# EAGLE board EBook_Reader_v26-Board (EAGLE 9.7.0)
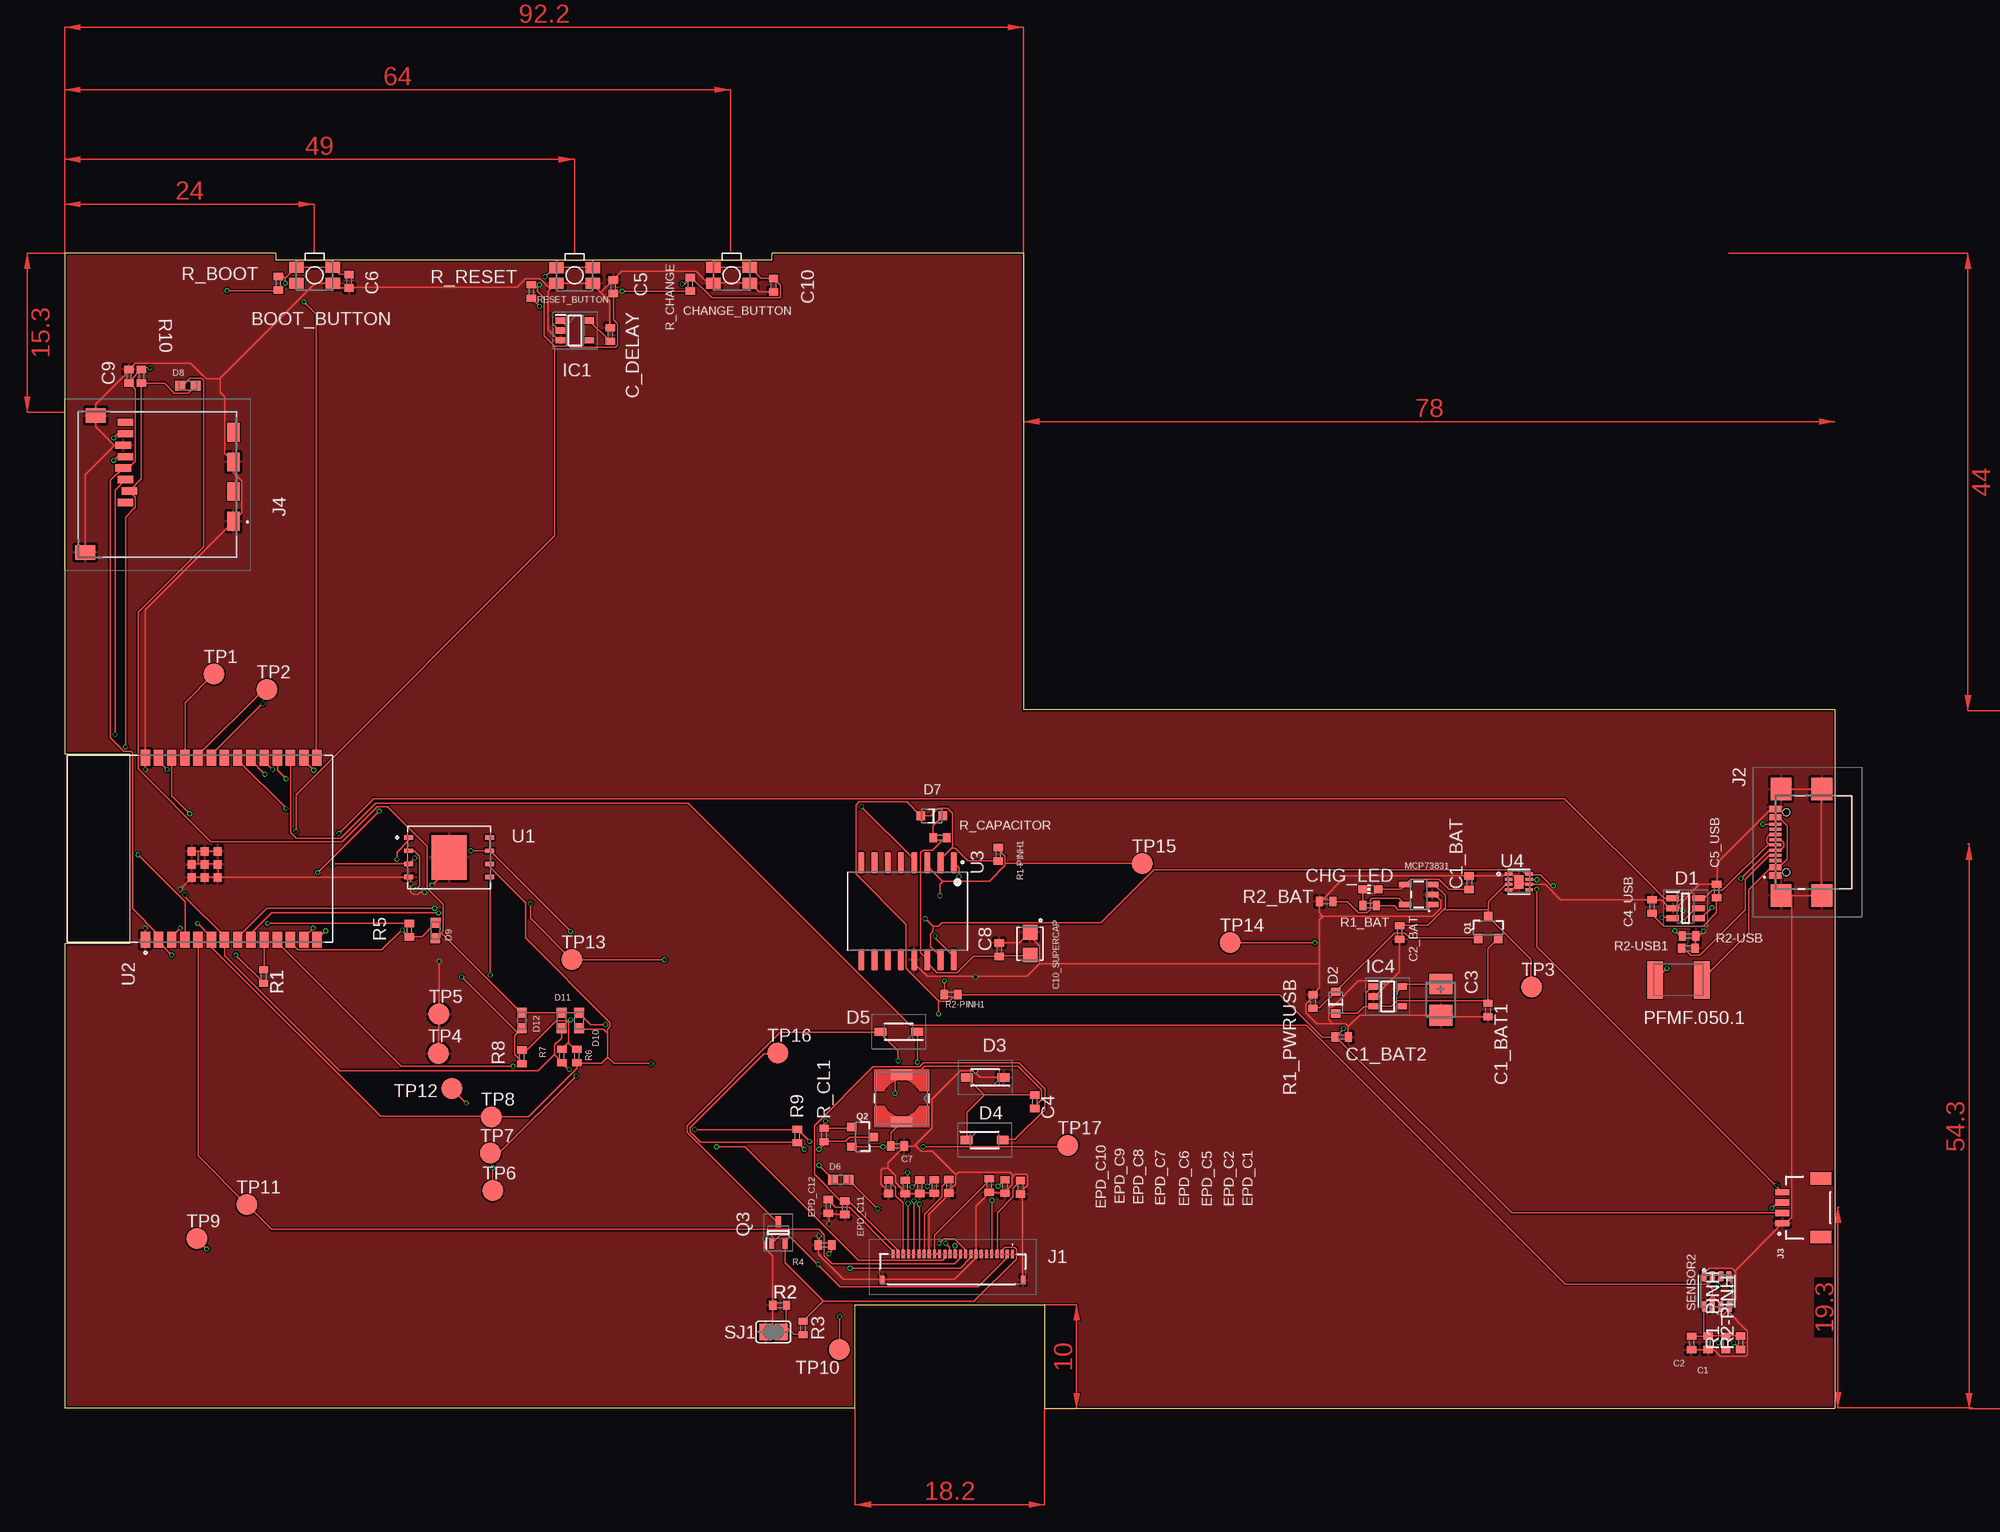
[diagram p0: board, top side]
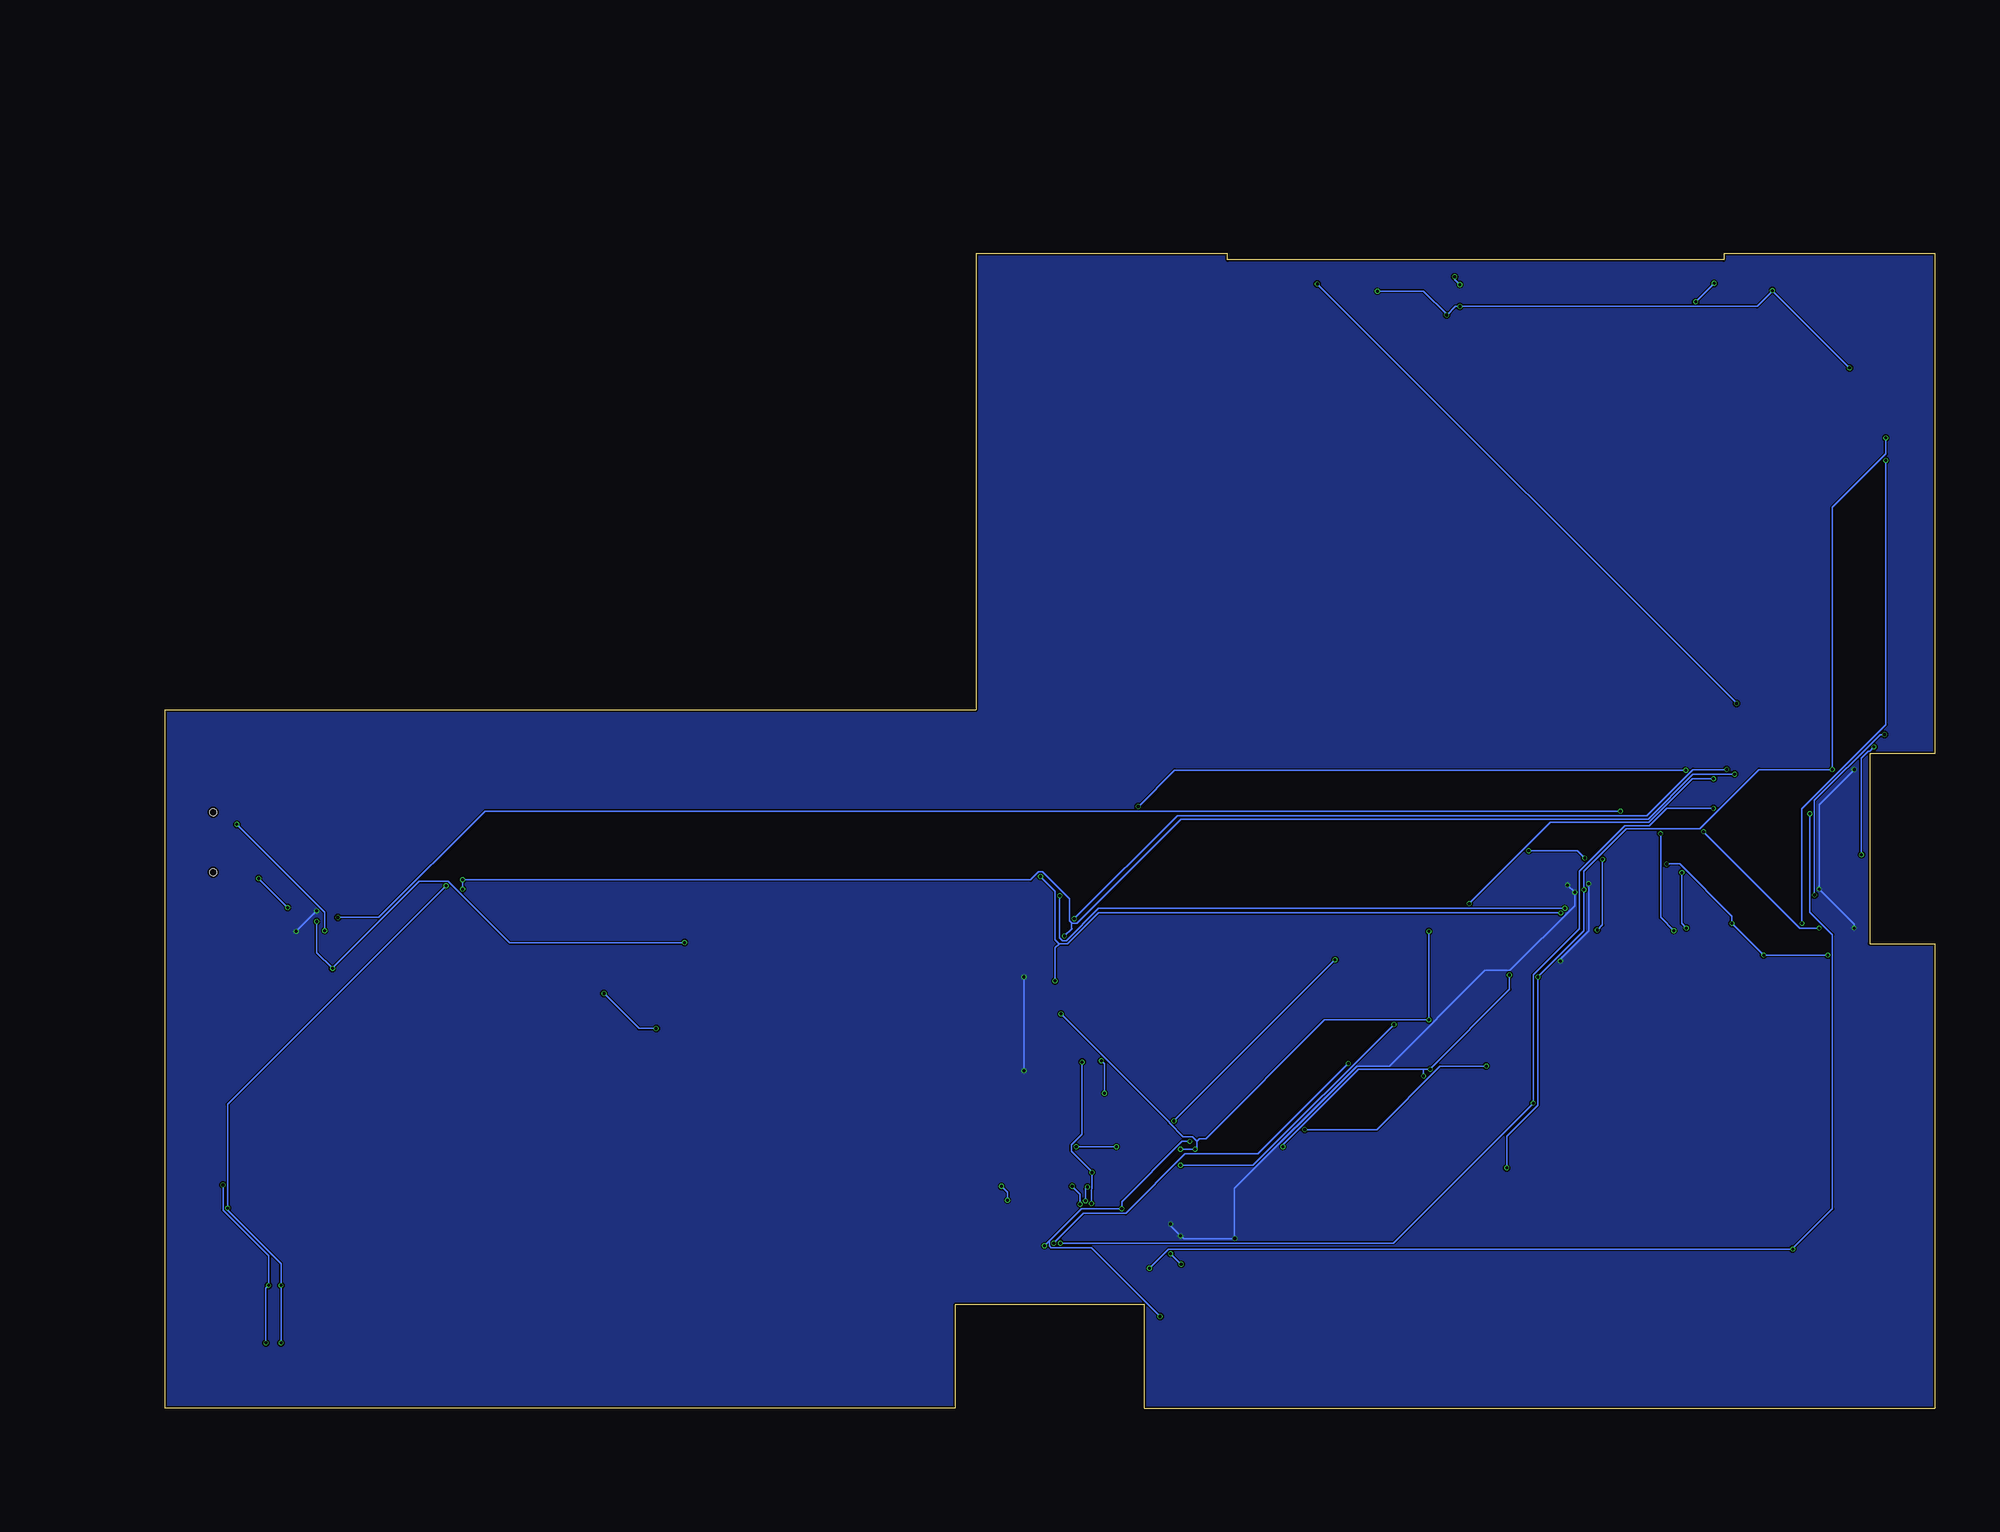
[diagram p1: board, bottom side, seen from below]

Size 170.2 x 111.05 mm. Coordinates in mm from the lower left corner, seen from the top.
Outline: 170.2,0 170.2,67.15 92.2,67.15 92.2,111.05 68,111.05 68,110.4 20.3,110.4 20.3,111.05 0,111.05 0,62.9 6.26,62.9 6.26,44.68 0,44.68 0,0 76,0 76,9.95 94.2,9.95 94.2,0 170.2,0
Outline: 170.2,0 170.2,0
Copper layers (1*16): Top 0.035mm / dielectric 1.6mm / Bottom 0.035mm
Design rules "jlcpcb-2layers.dru": minimum track width 5mil, minimum drill 0.3mm, track to track 5mil, track to pad 5mil, pad to pad 5mil, via to via 5mil, smd to smd 5mil, copper to edge 0.2mm, drill to drill 6mil, minimum pad ring 10mil, minimum via ring 3mil, stop-mask expansion 4mil, vias tented up to drill 0mil, thermal gap 10mil
Net classes: 1 power: width 0.3 mm; 2 normal: width 0.15 mm

## Footprints (pad centres in the part's own frame; a part is rotated, then mirrored left to right if it is on the bottom)
MYBUTTON = smd 1.4 x 1.05: 1 1.75,0.75; 2 -1.75,0.75; 3 -1.75,-0.75; 4 1.75,-0.75
ESP32_WROVER_EAGLE-LTSPICE_C0402 = smd 0.7 x 0.9: 1 -0.65,0; 2 0.65,0
RCL_CT3528 = smd 2 x 2.2: + -1.5,0; - 1.5,0
CAPCP3225X100N = smd 1.4 x 1.4: 1 -1.1,0; 2 1.1,0
ADAFRUIT_CHIP-LED0603 = smd 0.8 x 0.8: A 0,-0.75; C 0,0.75
SOT95P280X145-6N = smd 1.2 x 0.6: 1 -1.25,0.95; 2 -1.25,0; 3 -1.25,-0.95; 4 1.25,-0.95; 5 1.25,0; 6 1.25,0.95
ESP32_WROVER_AVX---SD0805S020S1R0_AVX_SD0805S020S1R0_0 = smd 0.8 x 0.9: 1 -1.05,0; 2 1.05,0
SOD3716X135N = smd 1.15 x 0.8: 1 -1.75,0; 2 1.75,0
DIOC1608X36N = smd 0.97 x 0.94: 1 -0.75,0; 2 0.75,0
SOT95P280X125-5N = smd 0.9 x 0.6: 1 -1.4,0.95; 2 -1.4,0; 3 -1.4,-0.95; 4 1.4,-0.95; 5 1.4,0.95
SOT95P280X120-5N = smd 0.9 x 0.6: 1 -1.4,0.95; 2 -1.4,0; 3 -1.4,-0.95; 4 1.4,-0.95; 5 1.4,0.95
FH34SRJ24S05SH99 = smd 0.3 x 0.8: 1 5.75,1.45; 2 5.25,1.45; 3 4.75,1.45; 4 4.25,1.45; 5 3.75,1.45; 6 3.25,1.45; 7 2.75,1.45; 8 2.25,1.45; 9 1.75,1.45; 10 1.25,1.45; 11 0.75,1.45; 12 0.25,1.45; 13 -0.25,1.45; 14 -0.75,1.45; 15 -1.25,1.45; 16 -1.75,1.45; 17 -2.25,1.45; 18 -2.75,1.45; 19 -3.25,1.45; 20 -3.75,1.45; 21 -4.25,1.45; 22 -4.75,1.45; 23 -5.25,1.45; 24 -5.75,1.45 | smd 0.4 x 0.8: MP1 6.75,-1.05; MP2 -6.75,-1.05
SAMACSYS_PARTS_USB4110GFA = smd 0.3 x 1.15: A1 -3.35,3.678; A4 -2.55,3.678; A5 -1.25,3.678; A6 -0.25,3.678; A7 0.25,3.678; A8 1.25,3.678; A9 2.55,3.678; A12 3.35,3.678; B1 3.05,3.678; B4 2.25,3.678; B5 1.75,3.678; B6 0.75,3.678; B7 -0.75,3.678; B8 -1.75,3.678; B9 -2.25,3.678; B12 -3.05,3.678 | smd 2.18 x 2: MP1 -5.11,-0.827; MP2 5.11,-0.827; MP3 -5.11,3.103; MP4 5.11,3.103 | hole 0.65: -2.89,2.603; 2.89,2.603
JST04_1MM_RA = smd 0.6 x 1.35: 1 -1.5,0; 2 -0.5,0; 3 0.5,0; 4 1.5,0 | smd 1.2 x 2: NC1 2.8,-3.675; NC2 -2.8,-3.675
112ATAARR03ATTEND = smd 1.8 x 1.2: G1 10.6,10.4; G2 4.9,10.4; S1 7.75,10.4; S2 2.05,10.4 | smd 1.4 x 1.9: G3 13.6,-3.85; G4 0.45,-2.85 | smd 0.7 x 1.5: P1 8.8,0; P2 7.7,0.4; P3 6.6,0; P4 5.5,-0.2; P5 4.4,0; P6 3.3,-0.2; P7 2.2,0; P8 1.1,0
IND_4828-WE-TPC_WRE = smd 1.016 x 2.032: 1 -2.286,0; 2 2.286,0
ESP32_WROVER_SPARKFUN-IC-POWER_SOT23-5 = smd 0.55 x 1.2: 1 -0.95,-1.3; 2 0,-1.3; 3 0.95,-1.3; 4 0.95,1.3; 5 -0.95,1.3
ESP32C6_VARISTOR_CT/CN1812 = smd 1.5 x 3.6: 1 -2.25,0; 2 2.25,0
ESP32_WROVER_SPARKFUN-DISCRETESEMI_SOT23-3 = smd 0.8 x 0.9: 1 -0.95,-1; 2 0.95,-1; 3 0,1.1
SOT65P210X110-3N = smd 1.05 x 0.5: 1 -1.05,0.65; 2 -1.05,-0.65; 3 1.05,0
ESP32_WROVER_EAGLE-LTSPICE_R0402 = smd 0.7 x 0.9: 1 -0.65,0; 2 0.65,0
ESP32_WROVER_BME680_PSON80P300X300X100-8N = smd 1.016 x 0.5: 1 1.458,1.2; 2 1.458,0.4; 3 1.458,-0.4; 4 1.458,-1.2; 5 -1.458,-1.22; 6 -1.458,-0.4; 7 -1.458,0.4; 8 -1.458,1.2
SJ = smd 1.168 x 1.6: 1 -0.762,0; 2 0.762,0
TP20R = smd 2 x 2: TP 0,0
SON127P600X800X80-9N = smd 0.94 x 0.44: 1 -3.895,1.905; 2 -3.895,0.635; 3 -3.895,-0.635; 4 -3.895,-1.905; 5 3.895,-1.905; 6 3.895,-0.635; 7 3.895,0.635; 8 3.895,1.905 | smd 3.4 x 4.3: 9 0,0
XCVR_ESP32-C6-WROOM-1-N8 = smd 1.5 x 0.9: 1 -8.75,5.26; 2 -8.75,3.99; 3 -8.75,2.72; 4 -8.75,1.45; 5 -8.75,0.18; 6 -8.75,-1.09; 7 -8.75,-2.36; 8 -8.75,-3.63; 9 -8.75,-4.9; 10 -8.75,-6.17; 11 -8.75,-7.44; 12 -8.75,-8.71; 13 -8.75,-9.98; 14 -8.75,-11.25; 15 8.75,-11.25; 16 8.75,-9.98; 17 8.75,-8.71; 18 8.75,-7.44; 19 8.75,-6.17; 20 8.75,-4.9; 21 8.75,-3.63; 22 8.75,-2.36; 23 8.75,-1.09; 24 8.75,0.18; 25 8.75,1.45; 26 8.75,2.72; 27 8.75,3.99; 28 8.75,5.26 | smd 0.8 x 0.8: 29_1 -2.755,0.79; 29_2 -1.505,0.79; 29_3 -0.255,0.79; 29_4 -2.755,-0.46; 29_5 -1.505,-0.46; 29_6 -0.255,-0.46; 29_7 -2.755,-1.71; 29_8 -1.505,-1.71; 29_9 -0.255,-1.71
SOIC127P1032X265-16N = smd 2.05 x 0.59: 1 -4.655,4.445; 2 -4.655,3.175; 3 -4.655,1.905; 4 -4.655,0.635; 5 -4.655,-0.635; 6 -4.655,-1.905; 7 -4.655,-3.175; 8 -4.655,-4.445; 9 4.655,-4.445; 10 4.655,-3.175; 11 4.655,-1.905; 12 4.655,-0.635; 13 4.655,0.635; 14 4.655,1.905; 15 4.655,3.175; 16 4.655,4.445
SON50P200X200X80-9N = smd 0.76 x 0.27: 1 -0.985,0.75; 2 -0.985,0.25; 3 -0.985,-0.25; 4 -0.985,-0.75; 5 0.985,-0.75; 6 0.985,-0.25; 7 0.985,0.25; 8 0.985,0.75 | smd 0.9 x 1.3: 9 0,0

## Placement (x,y rotation side)
BOOT_BUTTON  BUTTON_CUSYOMV1  [MYBUTTON]  24.02,108.92 180 top
C1  100nF  [ESP32_WROVER_EAGLE-LTSPICE_C0402]  158.02,6.29 270 top
C1_BAT  4.7uF  [ESP32_WROVER_EAGLE-LTSPICE_C0402]  135.05,50.53 90 top
C1_BAT1  4.7uF  [ESP32_WROVER_EAGLE-LTSPICE_C0402]  136.83,38.28 270 top
C1_BAT2  4.7uF  [ESP32_WROVER_EAGLE-LTSPICE_C0402]  122.77,35.68 0 top
C2  100nF  [ESP32_WROVER_EAGLE-LTSPICE_C0402]  156.42,6.27 270 top
C2_BAT  4.7uF  [ESP32_WROVER_EAGLE-LTSPICE_C0402]  128.36,45.73 270 top
C3  100uF TANT  [RCL_CT3528]  132.31,39.29 270 top
C4  4.7uF/25V  [ESP32_WROVER_EAGLE-LTSPICE_C0402]  93.25,29.48 270 top
C4_USB  100nF  [ESP32_WROVER_EAGLE-LTSPICE_C0402]  152.63,48.23 90 top
C5  1uF  [ESP32_WROVER_EAGLE-LTSPICE_C0402]  52.75,107.82 90 top
C5_USB  4.7uF  [ESP32_WROVER_EAGLE-LTSPICE_C0402]  158.84,49.73 90 top
C6  100nF  [ESP32_WROVER_EAGLE-LTSPICE_C0402]  27.35,108.34 270 top
C7  10uF  [ESP32_WROVER_EAGLE-LTSPICE_C0402]  80.06,25.21 0 top
C8  100nF  [ESP32_WROVER_EAGLE-LTSPICE_C0402]  89.85,44.09 90 top
C9  100nF  [ESP32_WROVER_EAGLE-LTSPICE_C0402]  6.16,99.21 90 top
C10  100nF  [ESP32_WROVER_EAGLE-LTSPICE_C0402]  68.15,107.96 270 top
C10_SUPERCAP  CPH3225A  [CAPCP3225X100N]  92.82,44.66 270 top
C_DELAY  100nF  [ESP32_WROVER_EAGLE-LTSPICE_C0402]  52.45,103.23 90 top
CHANGE_BUTTON  BUTTON_CUSYOMV1  [MYBUTTON]  64.12,108.92 180 top
CHG_LED  [ADAFRUIT_CHIP-LED0603]  125.55,49.9 90 top
D1  USBLC6-2SC6Y  [SOT95P280X145-6N]  155.85,48.07 0 top
D2  ESP32_WROVER_AVX---SD0805S020S1R0_AVX_SD0805S020S1R0_0_0AVX_SD0805S020S1R0_0_0  [ESP32_WROVER_AVX---SD0805S020S1R0_AVX_SD0805S020S1R0_0]  122.21,39 90 top
D3  MBR0530  [SOD3716X135N]  88.5,31.79 180 top
D4  MBR0530  [SOD3716X135N]  88.44,25.79 0 top
D5  MBR0530  [SOD3716X135N]  80.18,36.19 180 top
D6  PGB1010603MR  [DIOC1608X36N]  74.61,21.98 0 top
D7  ESP32_WROVER_AVX---SD0805S020S1R0_AVX_SD0805S020S1R0_0_0AVX_SD0805S020S1R0_0_0  [ESP32_WROVER_AVX---SD0805S020S1R0_AVX_SD0805S020S1R0_0]  83.37,56.96 180 top
D8  PGB1010603MR  [DIOC1608X36N]  11.85,98.3 0 top
D9  PGB1010603MR  [DIOC1608X36N]  35.65,45.92 89.7 top
D10  PGB1010603MR  [DIOC1608X36N]  49.45,37.29 270 top
D11  PGB1010603MR  [DIOC1608X36N]  47.77,37.29 270 top
D12  PGB1010603MR  [DIOC1608X36N]  43.95,37.28 270 top
EPD_C1  1uF/50V  [ESP32_WROVER_EAGLE-LTSPICE_C0402]  91.9,21.25 270 top
EPD_C2  1uF/50V  [ESP32_WROVER_EAGLE-LTSPICE_C0402]  90.4,21.33 270 top
EPD_C5  1uF/50V  [ESP32_WROVER_EAGLE-LTSPICE_C0402]  88.9,21.41 270 top
EPD_C6  1uF/50V  [ESP32_WROVER_EAGLE-LTSPICE_C0402]  85,21.35 270 top
EPD_C7  1uF/50V  [ESP32_WROVER_EAGLE-LTSPICE_C0402]  83.6,21.33 270 top
EPD_C8  1uF/50V  [ESP32_WROVER_EAGLE-LTSPICE_C0402]  82.2,21.31 270 top
EPD_C9  1uF/50V  [ESP32_WROVER_EAGLE-LTSPICE_C0402]  80.8,21.27 270 top
EPD_C10  1uF/50V  [ESP32_WROVER_EAGLE-LTSPICE_C0402]  79.2,21.29 270 top
EPD_C11  1uF/50V  [ESP32_WROVER_EAGLE-LTSPICE_C0402]  75,19.27 270 top
EPD_C12  1uF/50V  [ESP32_WROVER_EAGLE-LTSPICE_C0402]  73.4,19.41 270 top
IC1  BD5229G-TR  [SOT95P280X125-5N]  49.06,103.61 0 top
IC4  XC6220A331MR-G  [SOT95P280X120-5N]  127.21,39.59 0 top
J1  FH34SRJ-24S-0.5SH_99_  [FH34SRJ24S05SH99]  85.37,13.38 0 top
J2  SAMACSYS_PARTS_USB4110-GF-A  [SAMACSYS_PARTS_USB4110GFA]  168.13,54.41 90 top
J3  QWIIC_RIGHT_ANGLE  [JST04_1MM_RA]  165.16,19.28 90 top
J4  112A-TAAR-R03_ATTEND  [112ATAARR03ATTEND]  5.82,95.88 270 top
L1  68uH  [IND_4828-WE-TPC_WRE]  80.47,29.8 270 top
MCP73831  ESP32_WROVER_SPARKFUN-IC-POWER_MCP73831  [ESP32_WROVER_SPARKFUN-IC-POWER_SOT23-5]  130.18,49.39 90 top
PFMF.050.1  ESP32C6_VARISTORCN1812  [ESP32C6_VARISTOR_CT/CN1812]  155.16,41.19 180 top
Q1  20V/4.2A/52mΩ/1.4W  [ESP32_WROVER_SPARKFUN-DISCRETESEMI_SOT23-3]  136.86,46.16 0 top
Q2  20V/4.2A/52mΩ/1.4W  [ESP32_WROVER_SPARKFUN-DISCRETESEMI_SOT23-3]  76.67,26.09 270 top
Q3  SI1308EDL-T1-GE3  [SOT65P210X110-3N]  68.61,16.9 90 top
R1  10K  [ESP32_WROVER_EAGLE-LTSPICE_R0402]  19.12,41.51 270 top
R1-PINH1  10K  [ESP32_WROVER_EAGLE-LTSPICE_R0402]  89.75,53.27 270 top
R1_BAT  200  [ESP32_WROVER_EAGLE-LTSPICE_R0402]  125.47,48.33 0 top
R1_PINH  10K  [ESP32_WROVER_EAGLE-LTSPICE_R0402]  159.72,6.28 90 top
R1_PWRUSB  100K  [ESP32_WROVER_EAGLE-LTSPICE_R0402]  120.01,39.11 270 top
R2  2.2  [ESP32_WROVER_EAGLE-LTSPICE_R0402]  68.74,9.91 0 top
R2-PINH  10K  [ESP32_WROVER_EAGLE-LTSPICE_R0402]  161.12,6.29 90 top
R2-PINH1  10K  [ESP32_WROVER_EAGLE-LTSPICE_R0402]  85.21,39.77 0 top
R2-USB  5k1  [ESP32_WROVER_EAGLE-LTSPICE_R0402]  156.18,45.41 0 top
R2-USB1  5k1  [ESP32_WROVER_EAGLE-LTSPICE_R0402]  156.12,44.23 180 top
R2_BAT  2K  [ESP32_WROVER_EAGLE-LTSPICE_R0402]  121.28,48.73 0 top
R3  0.47  [ESP32_WROVER_EAGLE-LTSPICE_R0402]  70.98,7.71 90 top
R4  10K  [ESP32_WROVER_EAGLE-LTSPICE_R0402]  73.1,15.71 0 top
R5  10K  [ESP32_WROVER_EAGLE-LTSPICE_R0402]  33.15,45.96 90 top
R6  10K  [ESP32_WROVER_EAGLE-LTSPICE_R0402]  49.23,33.86 90 top
R7  10K  [ESP32_WROVER_EAGLE-LTSPICE_R0402]  47.81,33.86 90 top
R8  10K  [ESP32_WROVER_EAGLE-LTSPICE_R0402]  43.95,33.78 90 top
R9  10K  [ESP32_WROVER_EAGLE-LTSPICE_R0402]  70.43,26.18 270 top
R10  10K  [ESP32_WROVER_EAGLE-LTSPICE_R0402]  7.37,99.21 91.1 top
R_BOOT  10K  [ESP32_WROVER_EAGLE-LTSPICE_R0402]  20.55,108.14 90 top
R_CAPACITOR  15  [ESP32_WROVER_EAGLE-LTSPICE_R0402]  84.15,54.85 0 top
R_CHANGE  10K  [ESP32_WROVER_EAGLE-LTSPICE_R0402]  60.15,108.06 90 top
R_CL1  10k  [ESP32_WROVER_EAGLE-LTSPICE_R0402]  73,26.27 270 top
R_RESET  10k  [ESP32_WROVER_EAGLE-LTSPICE_R0402]  44.85,107.35 90 top
RESET_BUTTON  BUTTON_CUSYOMV1  [MYBUTTON]  49.02,108.9 180 top
SENSOR2  ESP32_WROVER_BME680_BME680  [ESP32_WROVER_BME680_PSON80P300X300X100-8N]  158.82,11.24 90 top
SJ1  [SJ]  68.13,7.34 0 top
TP1  TPTP20R  [TP20R]  14.35,70.58 0 top
TP2  TPTP20R  [TP20R]  19.45,69.1 0 top
TP3  TPTP20R  [TP20R]  141.03,40.5 0 top
TP4  TPTP20R  [TP20R]  35.91,34.1 0 top
TP5  TPTP20R  [TP20R]  35.99,37.9 0 top
TP6  TPTP20R  [TP20R]  41.15,20.92 0 top
TP7  TPTP20R  [TP20R]  40.93,24.52 0 top
TP8  TPTP20R  [TP20R]  41.01,28.02 0 top
TP9  TPTP20R  [TP20R]  12.69,16.32 0 top
TP10  TPTP20R  [TP20R]  74.45,5.64 0 top
TP11  TPTP20R  [TP20R]  17.5,19.58 0 top
TP12  TPTP20R  [TP20R]  37.2,30.74 0 top
TP13  TPTP20R  [TP20R]  48.75,43.14 0 top
TP14  TPTP20R  [TP20R]  112.05,44.76 0 top
TP15  TPTP20R  [TP20R]  103.6,52.36 0 top
TP16  TPTP20R  [TP20R]  68.55,34.16 0 top
TP17  TPTP20R  [TP20R]  96.45,25.28 0 top
U1  W25Q512JVEIQ  [SON127P600X800X80-9N]  36.96,52.96 0 top
U2  ESP32-C6-WROOM-1-N8  [XCVR_ESP32-C6-WROOM-1-N8]  13,53.79 90 top
U3  DS3231SN#  [SOIC127P1032X265-16N]  81.03,47.78 270 top
U4  MAX17048G+T10  [SON50P200X200X80-9N]  139.82,50.61 0 top

## Library data of the parts
BOOT_BUTTON CHANGE_BUTTON RESET_BUTTON = TSCTSCPROIECT
C1 C1_BAT C1_BAT1 C1_BAT2 C2 C2_BAT C4 C4_USB C5 C5_USB C6-C10 C_DELAY EPD_C1 EPD_C2 EPD_C5-EPD_C12 = componente-tsc; SPICEMODEL: NONE; SPICEPREFIX: C
C3 = componente-tsc; SPICEPREFIX: C
C10_SUPERCAP = componente-tsc; AVAILABILITY: Not in stock; CHECK_PRICES: https://www.snapeda.com/parts/CPH3225A/Seiko+Instruments/view-part/?ref=eda; DESCRIPTION: 11 mF (EDLC) Supercapacitor 3.3 V 1210 (3225 Metric) - -; MF: Seiko Instruments; MP: CPH3225A; PACKAGE: 1210 Seiko; PRICE: None; PURCHASE-URL: https://www.snapeda.com/api/url_track_click_mouser/?unipart_id=562593&manufacturer=Seiko Instruments&part_name=CPH3225A&search_term=None; SNAPEDA_LINK: https://www.snapeda.com/parts/CPH3225A/Seiko+Instruments/view-part/?ref=snap
CHG_LED PFMF.050.1 SJ1 TP1-TP17 = componente-tsc
D1 = componente-tsc; AVAILABILITY: In Stock; CHECK_PRICES: https://www.snapeda.com/parts/USBLC6-2SC6Y/STMicroelectronics/view-part/?ref=eda; DESCRIPTION: 17V Clamp 5A (8/20µs) Ipp Tvs Diode Surface Mount SOT-23-6; MF: STMicroelectronics; MP: USBLC6-2SC6Y; PACKAGE: SOT-23-6 STMicroelectronics; PRICE: None; SNAPEDA_LINK: https://www.snapeda.com/parts/USBLC6-2SC6Y/STMicroelectronics/view-part/?ref=snap
D2 D7 = componente-tsc; CENTROID_NOT_SPECIFIED: No; DATASHEET: http://datasheets.avx.com/schottky.pdf; DIGIKEY_DESCRIPTION: DIODE SCHOTTKY 20V 1A 0805; DIGIKEY_PART_NUMBER: 478-7800-1-ND; LEAD_FREE: yes; MF: AVX; MOUSER_PART_NUMBER: 581-SD0805S020S1R0; PACKAGE: 0805 (2012 metric); PREFIX: D; ROHS: yes; TEMPERATURE_RANGE_HIGH: +125°C; TEMPERATURE_RANGE_LOW: -55°C
D3-D5 = componente-tsc; AVAILABILITY: In Stock; CHECK_PRICES: https://www.snapeda.com/parts/MBR0530/Onsemi/view-part/?ref=eda; DESCRIPTION: Diode Schottky 30 V 500mA Surface Mount SOD-123; MF: ON Semiconductor; MP: MBR0530; PACKAGE: SOD-123-2 ON Semiconductor; PRICE: None; PURCHASE-URL: https://www.snapeda.com/api/url_track_click_mouser/?unipart_id=179458&manufacturer=ON Semiconductor&part_name=MBR0530&search_term=None; SNAPEDA_LINK: https://www.snapeda.com/parts/MBR0530/Onsemi/view-part/?ref=snap
D6 D8-D12 = componente-tsc; AVAILABILITY: In Stock; CHECK_PRICES: https://www.snapeda.com/parts/PGB1010603MR/Littelfuse/view-part/?ref=eda; DESCRIPTION: 150V (Typ) Clamp - Ipp Tvs Diode Surface Mount 0603 (1608 Metric); MF: Littelfuse Inc.; MP: PGB1010603MR; PACKAGE: 0603 Littelfuse Inc.; PRICE: None; PURCHASE-URL: https://www.snapeda.com/api/url_track_click_mouser/?unipart_id=5659453&manufacturer=Littelfuse Inc.&part_name=PGB1010603MR&search_term=None; SNAPEDA_LINK: https://www.snapeda.com/parts/PGB1010603MR/Littelfuse/view-part/?ref=snap
IC1 = TSCTSCPROIECT; DESCRIPTION: Voltage Detector with Adjustable Delay Time: CMOS processes are utilized to develop high precision, low current consumption CMOS reset ICs that allow arbitrary setting of the delay time. The extensive lineup includes both Nch Open Drain and CMOS output types in a wide range of detection voltages (from 2.3V to 6.0V, in 0.1V steps), enabling selection of the ideal solution based on customer requirements. In addition, the entire series is of course both lead-free and RoHS-compliant.; HEIGHT: 1.25mm; MANUFACTURER_NAME: ROHM Semiconductor; MANUFACTURER_PART_NUMBER: BD5229G-TR; MOUSER_PART_NUMBER: 755-BD5229G-TR; MOUSER_PRICE-STOCK: https://www.mouser.co.uk/ProductDetail/ROHM-Semiconductor/BD5229G-TR?qs=4kLU8WoGk0vvnhrrYwdszw%3D%3D
IC4 = componente-tsc; DESCRIPTION: LDO Voltage Regulators; HEIGHT: 1.2mm; MANUFACTURER_NAME: Torex; MANUFACTURER_PART_NUMBER: XC6220A331MR-G; MOUSER_PART_NUMBER: 865-XC6220A331MR-G; MOUSER_PRICE-STOCK: https://www.mouser.co.uk/ProductDetail/Torex-Semiconductor/XC6220A331MR-G?qs=AsjdqWjXhJ8ZSWznL1J0gg%3D%3D
J1 = componente-tsc; DESCRIPTION: 24 Position FFC, FPC Connector Contacts, Top and Bottom 0.020" (0.50mm) Surface Mount, Right Angle; HEIGHT: 1.1mm; MANUFACTURER_NAME: Hirose; MANUFACTURER_PART_NUMBER: FH34SRJ-24S-0.5SH(99); MOUSER_PART_NUMBER: 798-FH34SRJ24S05SH99; MOUSER_PRICE-STOCK: https://www.mouser.co.uk/ProductDetail/Hirose-Connector/FH34SRJ-24S-0.5SH99?qs=vcbW%252B4%252BSTIpKBl5ap9J8Fw%3D%3D
J2 = componente-tsc; DESCRIPTION: CONN USB 2.0 TYPE-C R/A SMT; HEIGHT: 3.26mm; MANUFACTURER_NAME: GCT (GLOBAL CONNECTOR TECHNOLOGY); MANUFACTURER_PART_NUMBER: USB4110-GF-A; MOUSER_PART_NUMBER: 640-USB4110-GF-A; MOUSER_PRICE-STOCK: https://www.mouser.co.uk/ProductDetail/GCT/USB4110-GF-A?qs=KUoIvG%2F9IlYiZvIXQjyJeA%3D%3D
J3 = componente-tsc; PROD_ID: CONN-13694
J4 = componente-tsc; DESCRIPTION: Micro SD Card Socket, Push-Push Type, Top Mount, SMT, H=1.83mm, 10u; HEIGHT: 1.9mm; MANUFACTURER_NAME: ATTEND; MANUFACTURER_PART_NUMBER: 112A-TAAR-R03 ATTEND
L1 = componente-tsc; COPYRIGHT: Copyright (C) 2024 Ultra Librarian. All rights reserved.; MANUFACTURER_PART_NUMBER: 744043680; MFR_NAME: Wurth Electronics
MCP73831 = componente-tsc; PROD_ID: IC-09995
Q1 = componente-tsc; PROD_ID: TRAN-14388
Q2 = TSCTSCPROIECT; PROD_ID: TRAN-14388
Q3 = componente-tsc; AVAILABILITY: In Stock; CHECK_PRICES: https://www.snapeda.com/parts/SI1308EDL-T1-GE3/Vishay+Siliconix/view-part/?ref=eda; DESCRIPTION: Si1308EDL-T1-GE3 N-channel MOSFET Transistor, 1.5 A, 30 V, 3-Pin SC-70 | Siliconix / Vishay SI1308EDL-T1-GE3; MF: Vishay Siliconix; MP: SI1308EDL-T1-GE3; PACKAGE: SOT-323 Vishay Semiconductor; PRICE: None; PURCHASE-URL: https://www.snapeda.com/api/url_track_click_mouser/?unipart_id=274603&manufacturer=Vishay Siliconix&part_name=SI1308EDL-T1-GE3&search_term=None; SNAPEDA_LINK: https://www.snapeda.com/parts/SI1308EDL-T1-GE3/Vishay+Siliconix/view-part/?ref=snap
R1 R1-PINH1 R1_BAT R1_PWRUSB R2 R2-PINH1 R2-USB R2-USB1 R2_BAT R3-R10 R_CAPACITOR = componente-tsc; SPICEMODEL: NONE; SPICEPREFIX: R
R1_PINH R2-PINH R_BOOT R_CHANGE R_CL1 R_RESET = TSCTSCPROIECT; SPICEMODEL: NONE; SPICEPREFIX: R
SENSOR2 = TSCTSCPROIECT; AVAILABILITY: Unavailable; DESCRIPTION: Integrated Environmental Unit; MF: Bosch Sensortec; MP: BME680; PACKAGE: LGA-8 Bosch Tools; PRICE: None
U1 = componente-tsc; AVAILABILITY: In Stock; CHECK_PRICES: https://www.snapeda.com/parts/W25Q512JVEIQ/Winbond+Electronics/view-part/?ref=eda; DESCRIPTION: FLASH - NOR Memory IC 512Mb (64M x 8) SPI - Quad I/O 133 MHz 8-WSON (8x6); MF: Winbond Electronics; MP: W25Q512JVEIQ; PACKAGE: Package; PRICE: None; SNAPEDA_LINK: https://www.snapeda.com/parts/W25Q512JVEIQ/Winbond+Electronics/view-part/?ref=snap
U2 = componente-tsc; AVAILABILITY: In Stock; CHECK_PRICES: https://www.snapeda.com/parts/ESP32-C6-WROOM-1-N8/Espressif+Systems/view-part/?ref=eda; DESCRIPTION: Multiprotocol Modules ESP32-C6 module, Wi-Fi 6 in 2.4 GHz band, Bluetooth 5, Zigbee 3.0 and Thread. ESP34-WROOM Compatible - ENGINEERING SAMPLE; MF: Espressif Systems; MP: ESP32-C6-WROOM-1-N8; PACKAGE: None; PRICE: None; SNAPEDA_LINK: https://www.snapeda.com/parts/ESP32-C6-WROOM-1-N8/Espressif+Systems/view-part/?ref=snap
U3 = componente-tsc; AVAILABILITY: In Stock; CHECK_PRICES: https://www.snapeda.com/parts/DS3231SN%23/Analog+Devices/view-part/?ref=eda; DESCRIPTION: Extremely Accurate I²C-Integrated RTC/TCXO/Crystal; MF: Analog Devices; MP: DS3231SN#; PACKAGE: SOIC-16 Maxim; PRICE: None; PURCHASE-URL: https://www.snapeda.com/api/url_track_click_mouser/?unipart_id=99048&manufacturer=Analog Devices&part_name=DS3231SN#&search_term=None; SNAPEDA_LINK: https://www.snapeda.com/parts/DS3231SN%23/Analog+Devices/view-part/?ref=snap
U4 = TSCTSCPROIECT; AVAILABILITY: In Stock; CHECK_PRICES: https://www.snapeda.com/parts/MAX17048G+T10/Analog+Devices/view-part/?ref=eda; DESCRIPTION: 3µA 1-Cell/2-Cell Fuel Gauge with ModelGauge; MF: Analog Devices; MP: MAX17048G+T10; PACKAGE: TDFN-8 Maxim; PRICE: None; PURCHASE-URL: https://www.snapeda.com/api/url_track_click_mouser/?unipart_id=329239&manufacturer=Analog Devices&part_name=MAX17048G+T10&search_term=None; SNAPEDA_LINK: https://www.snapeda.com/parts/MAX17048G+T10/Analog+Devices/view-part/?ref=snap

## Nets
3V3: C1_BAT2.1 C3.+ C9.1 D7.2 IC1.2 IC4.5 J3.2 J4.P4 Q2.3 R1-PINH1.2 R1.2 R2-PINH1.2 R5.2 R6.2 R7.2 R8.2 R9.2 R10.2 R_BOOT.1 R_CHANGE.1 R_CL1.2 R_RESET.1 TP16.TP U1.3 U1.7 U1.8 U2.2 U3.2
32KHZ [normal]: R2-PINH1.1 U2.9 U3.1
DN [normal]: D1.4 J2.A7 J2.B7
DP [normal]: D1.6 J2.A6 J2.B6
EPD_3V3: Q2.2 TP17.TP
EPD_3V3_C: Q2.1 R_CL1.1 TP13.TP U2.18
EPD_BUSY [normal]: J1.9 TP9.TP U2.26
EPD_CS [normal]: D6.2 J1.12 R9.1 TP10.TP U2.11
EPD_DC [normal]: J1.11 TP11.TP U2.5
EPD_RST [normal]: J1.10 TP12.TP U2.21
FLASH_CS [normal]: D9.2 R5.1 U1.1 U2.12
GDR [normal]: J1.2 Q3.1 R4.2
GND [normal]: BOOT_BUTTON.2 C1.2 C1_BAT1.2 C1_BAT2.2 C1_BAT.2 C2.2 C2_BAT.2 C3.- C4_USB.2 C5.2 C5_USB.2 C6.2 C7.2 C8.2 C9.2 C10.2 C10_SUPERCAP.1 C_DELAY.2 CHANGE_BUTTON.1 CHANGE_BUTTON.2 D1.2 D3.1 EPD_C1.2 EPD_C2.2 EPD_C5.2 EPD_C6.2 EPD_C7.2 EPD_C8.2 EPD_C9.2 EPD_C10.2 EPD_C11.2 EPD_C12.2 IC1.3 IC4.2 J1.8 J1.17 J1.MP1 J1.MP2 J2.A1 J2.A12 J2.B1 J2.B12 J2.MP1 J2.MP2 J2.MP3 J2.MP4 J3.1 J4.G1 J4.G2 J4.G3 J4.G4 J4.P6 MCP73831.2 R1_PWRUSB.1 R2-USB1.1 R2-USB.2 R2.1 R2_BAT.1 R4.1 RESET_BUTTON.1 RESET_BUTTON.2 SENSOR2.1 SENSOR2.5 SENSOR2.7 SJ1.1 TP4.TP TP5.TP U1.4 U1.9 U2.1 U2.28 U2.29_1 U2.29_2 U2.29_3 U2.29_4 U2.29_5 U2.29_6 U2.29_7 U2.29_8 U2.29_9 U3.13 U4.1 U4.4 U4.6 U4.9
GND1 [normal]: D6.1 D8.1 D9.1 D10.1 D11.1 D12.1
GPIO8 [normal]: R1.1 U2.10
I2C_PW [normal]: C1.1 C2.1 R1_PINH.2 R2-PINH.2 SENSOR2.2 SENSOR2.6 SENSOR2.8 U2.17
INT_RTC [normal]: R1-PINH1.1 TP15.TP U2.8 U3.3
IO/BOOT [normal]: BOOT_BUTTON.3 BOOT_BUTTON.4 C6.1 R_BOOT.2 U2.15
IO/CHANGE [normal]: C10.1 CHANGE_BUTTON.3 CHANGE_BUTTON.4 R_CHANGE.2 U2.23
MISO [normal]: D12.2 J4.P7 R8.1 TP6.TP U1.2 U2.27
MOSI [normal]: D11.2 J1.14 J4.P3 R7.1 TP7.TP U1.5 U2.7
N$1 [normal]: J2.B5 R2-USB.1
N$2 [normal]: EPD_C2.1 J1.5
N$3 [normal]: EPD_C1.1 J1.4
N$4 [normal]: J2.A5 R2-USB1.2
N$7 [normal]: C_DELAY.1 IC1.5
N$9 [normal]: D7.1 R_CAPACITOR.1
N$14 [normal]: C4_USB.1 C5_USB.1
N$16 [normal]: D2.2 Q1.1 R1_PWRUSB.2
N$17 [normal]: C1_BAT1.1 D2.1 IC4.1 IC4.3 Q1.2
N$24 [normal]: C7.1 L1.2
N$26 [normal]: C4.1 D3.2 D4.1
N$33 [normal]: C1_BAT.1 CHG_LED.A MCP73831.4
N$34 [normal]: CHG_LED.C R1_BAT.1
N$35 [normal]: MCP73831.1 R1_BAT.2
N$36 [normal]: MCP73831.5 R2_BAT.2
N$49 [normal]: EPD_C12.1 J1.24
N$64 [normal]: EPD_C10.1 J1.22
N$66 [normal]: EPD_C8.1 J1.20
N$67 [normal]: EPD_C7.1 J1.19
N$68 [normal]: EPD_C6.1 J1.18
N$70 [normal]: EPD_C5.1 J1.15 J1.16
PREVGH [normal]: D5.1 EPD_C9.1 J1.21
PREVGL [normal]: D4.2 EPD_C11.1 J1.23
RESE [normal]: J1.3 Q3.2 R3.2
RESE' [normal]: R2.2 R3.1 SJ1.2
RESET [normal]: C5.1 IC1.1 R_RESET.2 RESET_BUTTON.3 RESET_BUTTON.4 U2.3
RTC_RST [normal]: U2.16 U3.4
RX [normal]: TP2.TP U2.24
SCK [normal]: D10.2 J1.13 J4.P5 R6.1 TP8.TP U1.6 U2.6
SCL [normal]: J3.4 R2-PINH.1 SENSOR2.4 U2.20 U3.16 U4.7
SDA [normal]: J3.3 R1_PINH.1 SENSOR2.3 U2.19 U3.15 U4.8
SRC [normal]: C4.2 D5.2 L1.1 Q3.3
SS_SD [normal]: D8.2 J4.P2 R10.1 U2.4
TX [normal]: TP1.TP U2.25
USB_D+ [normal]: D1.1 U2.14
USB_D- [normal]: D1.3 U2.13
VBAT: C2_BAT.1 MCP73831.3 Q1.3 TP3.TP U4.2 U4.3
VBUS: D1.5 PFMF.050.1.2 TP14.TP
VRTC: C8.1 C10_SUPERCAP.2 R_CAPACITOR.2 U3.14
VUSB: J2.A4 J2.A9 J2.B4 J2.B9 PFMF.050.1.1

## Tracks (layer width: path | path; a pad name or v marks a point on that pad's centre or on a via)
3V3  (via drill 0.3)
  Top 0.127: v45.66,105.92 44.9,106.68 R_RESET.1 | v46.93,105.1 46.93,104.27 47.62,103.57 IC1.2 | v53.59,107.38 60.13,107.38 R_CHANGE.1 | v15.62,107.45 20.51,107.45 R_BOOT.1 | v8.19,100.02 7.49,100.02 7.37,99.89 R10.2 7.3,99.83 6.22,98.75 6.22,98.62 C9.1 6.22,98.56 6.79,97.98 6.79,91.06 6.16,90.43 5.65,90.43 J4.P4 5.59,90.36 5.08,89.86 5.02,89.86 4.38,89.22 4.38,64.45 5.67,63.17 6.37,63.17 6.52,63.01 6.52,48.03 8.95,45.6 8.95,45.09 U2.2 9.02,45.03 9.02,44.84 v10.29,43.57 | v122.94,36.52 122.94,36.45 122.17,35.69 C1_BAT2.1 | v127.95,39.88 128.59,40.52 IC4.5 128.65,40.58 128.84,40.77 132.27,40.77 C3.+ | J3.2 165.1,18.8 139.13,18.8 122.24,35.69 C1_BAT2.1 | 40.83,53.6 40.83,54.87 U1.8 | v16.45,43.57 19.11,40.9 R1.2 | v19.49,46.61 R5.2 | v25.78,52.33 U1.3 33.08,52.33 v33.66,52.9 | v39.05,53.6 40.83,53.6 | 40.83,53.6 U1.7 40.89,53.6 v48.64,45.85 | 85.31,53.88 84.26,52.84 84.26,52.46 U3.2 | 85.31,53.88 85.34,53.92 85.34,57.22 84.9,57.66 83.95,57.66 83.25,56.96 82.36,56.96 D7.2 82.3,56.96 80.96,58.3 76.39,58.3 76.07,57.98 76.07,51.38 80.9,46.55 80.9,42.3 84.04,39.15 | 84.04,39.15 84.07,39.12 85.03,39.12 85.66,39.76 85.85,39.76 R2-PINH1.2 85.92,39.76 116.84,39.76 120.9,35.69 C1_BAT2.1 | R1-PINH1.2 89.72,52.65 86.87,52.65 85.66,53.85 85.34,53.85 85.31,53.88 | 48.42,37.12 48.45,37.09 48.45,35.18 48.42,35.15 | 48.42,37.12 48.26,37.28 47.24,37.28 44.45,34.48 44.01,34.48 R8.2 | 48.42,35.15 47.82,34.55 R7.2 | 48.42,35.15 49.02,34.55 49.21,34.55 R6.2 | Q2.3 77.72,26.04 75.44,26.04 75.06,25.66 73.03,25.66 R_CL1.2 72.96,25.59 72.96,25.34 v72.52,24.9 | TP16.TP 68.52,34.1 67.25,34.1 60.13,26.99 60.13,26.61 61.15,25.59 70.42,25.59 R9.2 70.48,25.53 v71.12,24.9
  Top 0.127: v48.64,37.34 48.42,37.12 | v84.01,37.91 84.01,39.12 84.04,39.15
  Bottom 0.127: v53.59,107.38 49.15,107.38 46.93,105.16 v46.93,105.1 46.1,105.92 v45.66,105.92 17.08,105.92 15.62,107.38 v15.62,107.45 v8.19,100.02 | v122.94,36.52 124.59,36.52 v127.95,39.88 | v10.29,43.57 v16.45,43.57 v19.49,46.61 19.49,47.31 24.51,52.33 v25.78,52.33 | v39.05,53.6 34.35,53.6 v33.66,52.9 | v72.52,24.9 v71.12,24.9 70.98,25.04 | 70.08,25.94 58.67,37.34 v48.64,37.34 v48.64,45.85 | v84.01,37.91 73.6,27.5 73.6,27.44 72.26,26.1 71.37,26.1 70.96,25.69
  Bottom 0.152: 70.08,25.94 70.72,25.94 70.96,25.69 70.96,25.05 70.98,25.04
32KHZ  (via drill 0.3)
  Top 0.15: v84.58,41.09 84.58,39.82 R2-PINH1.1 | v85.98,51.12 85.98,51.95 85.53,52.39 U3.1 | v35.94,47.63 19.88,47.63 17.91,45.66 17.91,45.09 U2.9
  Bottom 0.15: 84.58,45.05 84.58,49.73 v85.98,51.12 | 84.58,44.25 v84.58,41.09 | v35.94,47.63 80.39,47.63 83.38,44.65 84.2,44.65
  Bottom 0.152: 84.58,45.05 84.58,45.03 84.2,44.65 84.2,44.64 84.58,44.25
DN  (via drill 0.3)
  Top 0.15: J2.A7 164.47,54.61 165.04,54.61 165.29,54.36 165.29,53.98 165.04,53.73 164.47,53.73 J2.B7 164.4,53.66 163.89,53.66 v161.16,50.93 | v158.37,48.14 157.42,47.19 157.16,47.19 D1.4
  Bottom 0.15: v161.16,50.93 v158.37,48.14
DP
  Top 0.15: 163.83,54.23 163.64,54.42 163.64,54.87 163.89,55.12 164.4,55.12 J2.B6 | 163.83,54.23 163.89,54.17 164.4,54.17 J2.A6 | 163.83,54.23 159.38,49.79 158.43,49.79 157.67,49.03 157.16,49.03 D1.6
EPD_3V3  (via drill 0.3)
  Top 0.127: v78.68,25.15 75.69,25.15 Q2.2 | v82.55,25.15 96.27,25.15 96.39,25.28 TP17.TP
  Bottom 0.127: v82.55,25.15 v78.68,25.15
EPD_3V3_C  (via drill 0.3)
  Top 0.127: Q2.1 75.63,26.99 75.56,26.93 73.03,26.93 R_CL1.1 73.03,26.99 73.03,27.5 v73.15,27.63 | v21.27,60.52 20.45,61.35 20.45,62.49 U2.18 | v44.77,48.52 44.77,47.12 48.7,43.18 TP13.TP 48.77,43.12 v57.66,43.12
  Bottom 0.127: v21.27,60.52 23.3,60.52 27.5,56.33 36.96,56.33 v44.77,48.52 | v57.66,43.12 v73.15,27.63
EPD_BUSY  (via drill 0.3)
  Top 0.15: v75.5,13.47 86.11,13.47 87.06,14.42 87.06,14.8 J1.9 | v13.65,15.31 12.7,16.26 TP9.TP | v12,57.15 10.29,58.87 10.29,62.49 U2.26
  Bottom 0.15: v75.5,13.47 73.66,15.31 v13.65,15.31 13.65,15.37 9.84,19.18 9.84,45.53 12,47.69 v12,57.15
EPD_CS  (via drill 0.3)
  Top 0.15: v85.6,15.63 85.6,14.86 J1.12 | v78.17,19.18 75.37,21.98 D6.2 | v71.63,25.66 70.48,26.8 R9.1 70.42,26.8 v60.58,26.8 | v43.12,32.9 32.32,32.9 20.45,44.77 20.45,45.03 U2.11 | v74.49,8.83 74.49,5.66 TP10.TP
  Bottom 0.15: v85.6,15.63 85.38,15.85 85.14,16.09 82.04,19.18 v78.17,19.18 78.17,19.88 72.39,25.66 v71.63,25.66 | v43.12,32.9 47.56,32.9 53.66,26.8 v60.58,26.8 | v74.49,8.83 81.09,15.43 84.96,15.43 85.14,15.61
  Bottom 0.152: 85.14,15.61 85.14,16.08 85.14,16.09
EPD_DC
  Top 0.15: J1.11 86.11,14.8 86.11,14.48 85.53,13.91 73.79,13.91 73.03,14.67 73.03,16.71 72.52,17.21 19.88,17.21 17.53,19.56 TP11.TP 17.46,19.63 12.83,24.26 12.83,45.03 U2.5
EPD_RST  (via drill 0.3)
  Top 0.15: v84.07,15.88 84.52,16.32 85.53,16.32 86.61,15.24 86.61,14.86 J1.10 | v38.61,29.34 TP12.TP | v21.27,57.66 16.64,62.3 16.64,62.49 U2.21
  Bottom 0.15: v84.07,15.88 52.07,15.88 v38.61,29.34 38.61,29.41 38.61,41.66 34.16,46.11 34.16,51.63 29.78,56.01 27.43,56.01 25.78,57.66 v21.27,57.66
FLASH_CS  (via drill 0.3)
  Top 0.15: D9.2 35.62,46.61 34.35,45.34 33.21,45.34 R5.1 33.08,45.34 v32.45,45.98 32.38,45.98 30.48,44.07 22.42,44.07 21.72,44.77 21.72,45.03 U2.12 | v31.94,52.77 31.94,53.47 33.02,54.55 33.02,54.87 U1.1
  Bottom 0.15: v31.94,52.77 31.94,46.49 v32.45,45.98
GDR  (via drill 0.3)
  Top 0.15: 72.42,13.82 69.6,16.64 68.77,16.64 68.01,15.88 Q3.1 | 72.42,13.82 74.55,11.69 87.82,11.69 90.61,14.48 90.61,14.8 J1.2 | v73.47,14.86 73.72,15.12 73.72,15.69 R4.2 | v72.45,13.85 72.42,13.82
  Bottom 0.15: v72.45,13.85 v73.47,14.86
GND  (via drill 0.3)
  Top 0.15: TP4.TP 35.94,34.1 35.94,37.85 TP5.TP 36.01,37.98 v36.01,42.99 | 12.83,52.33 13.4,52.33 U2.29_5 13.53,52.33 14.67,52.33 U2.29_8 14.73,52.27 14.73,51.12 U2.29_7 | 12.83,52.33 12.26,52.33 U2.29_2 | 12.83,53.53 13.4,53.53 U2.29_6 13.53,53.53 14.67,53.53 U2.29_9 | 12.83,53.53 12.26,53.53 U2.29_3 | 12.83,53.53 12.83,52.33 | U2.29_7 14.67,51.06 13.53,51.06 U2.29_4 13.4,51.06 12.26,51.06 U2.29_1 12.19,50.99 v11.11,49.92 | U2.29_7 14.73,51.06 U1.4 33.08,50.99 33.27,50.8 v33.27,50.42 33.27,49.66 33.53,49.41 33.91,49.41 34.1,49.6 v34.61,49.6 | v7.75,46.17 7.75,45.09 U2.1 | v35.31,50.3 36.96,51.95 U1.9 | C10.2 68.14,107.32 66.74,107.32 65.91,108.14 CHANGE_BUTTON.2 65.85,108.21 62.42,108.21 CHANGE_BUTTON.1 62.36,108.21 61.78,108.21 60.71,109.29 53.53,109.29 52.77,108.53 C5.2 52.7,108.46 51.53,107.29 | 51.53,107.29 50.8,108.02 50.8,108.14 RESET_BUTTON.2 50.74,108.14 47.31,108.14 RESET_BUTTON.1 | 51.53,107.29 52.39,106.43 52.39,103.89 C_DELAY.2 | IC1.3 47.62,102.68 47.5,102.68 46.48,103.7 46.48,107.38 47.24,108.14 RESET_BUTTON.1 | RESET_BUTTON.1 46.67,107.64 45.72,108.59 44.32,108.59 43.5,107.76 27.37,107.76 C6.2 27.3,107.7 26.23,107.7 25.78,108.14 BOOT_BUTTON.2 25.72,108.14 24.07,108.14 14.94,99.02 | 4.76,92.59 5.59,92.59 J4.P6 | 4.76,92.59 2.98,94.37 2.98,95.38 J4.G4 2.98,95.44 2.98,96.52 6.16,99.7 6.16,99.83 C9.2 6.22,99.89 6.79,100.46 12.13,100.46 13.62,98.97 | J4.G3 1.97,82.3 1.97,89.73 4.76,92.52 4.76,92.59 | 14.97,97.62 15.37,97.22 15.37,91.83 16.19,91 J4.G2 16.26,90.94 16.26,89.92 17.02,89.16 17.02,86.11 16.26,85.35 J4.G1 16.19,85.22 7.75,76.78 U2.28 7.75,62.49 v7.75,61.41
  Top 0.15: C2.2 156.46,5.66 157.99,5.66 C1.2 158.05,5.59 158.62,5.59 159.19,5.02 161.61,5.02 161.8,5.21 161.8,7.43 159.89,9.34 SENSOR2.5 | SENSOR2.7 158.43,9.78 158.43,9.53 158.94,9.02 159.51,9.02 160.02,9.53 160.02,9.78 SENSOR2.5 | 160.56,13.18 160.66,13.09 160.66,10.42 160.08,9.85 SENSOR2.5 | 160.56,13.18 160.27,13.47 158.12,13.47 157.67,13.02 157.67,12.7 SENSOR2.1 | 160.56,13.18 165.1,17.72 J3.1 165.23,17.78 165.48,17.78 166.05,18.36 166.05,49.28 | J2.B12 164.47,51.31 164.47,51.12 J2.A1 164.47,50.99 164.47,49.85 164.97,49.34 J2.MP3 165.1,49.28 166.05,49.28 | 166.05,49.28 168.91,49.28 J2.MP1 168.91,49.34 168.91,59.44 J2.MP2 168.91,59.5 165.1,59.5 J2.MP4 164.97,59.5 164.47,59 164.47,57.79 J2.A12 164.47,57.73 164.47,57.47 J2.B1 164.4,57.41 163.83,57.41 158.88,52.46 158.88,50.42 C5_USB.2 158.81,50.36 157.16,50.36 154.94,48.14 154.62,48.14 D1.2 | U4.4 138.88,49.92 139.19,49.92 139.83,50.55 U4.9 | U4.9 139.83,50.68 139.19,51.31 138.88,51.31 U4.1 138.81,51.31 138.49,51.31 138.37,51.19 135.06,51.19 C1_BAT.2 135,51.19 123.19,51.19 120.71,48.71 R2_BAT.1 120.65,48.71 120.65,47.65 | U4.9 139.89,50.55 140.02,50.42 140.78,50.42 U4.6 140.84,50.36 142.37,50.36 143.83,48.9 152.59,48.9 C4_USB.2 152.65,48.84 153.54,48.84 154.31,48.07 154.56,48.07 D1.2 | R2-USB1.1 156.78,44.26 156.78,45.41 R2-USB.2 156.84,45.47 157.16,45.47 v157.54,45.85 | v155.57,47.82 155.13,48.26 D1.2 | SJ1.1 67.37,7.37 68.07,8.07 68.07,9.91 R2.1 68.07,9.97 68.07,14.67 67.31,15.43 v67.31,16.32 | EPD_C11.2 74.99,18.67 73.47,18.67 73.41,18.74 EPD_C12.2 73.47,18.61 v73.47,17.72
  Top 0.15: v72.52,16.58 72.52,15.75 R4.1 72.45,15.69 72.45,14.8 74.87,12.39 78.61,12.39 J1.MP2 78.68,12.39 85.53,12.39 87.57,14.42 87.57,14.8 J1.8 87.63,14.86 87.63,19.44 88.9,20.71 EPD_C5.2 88.96,20.71 90.36,20.71 EPD_C2.2 90.36,20.77 91.06,21.47 91.06,22.17 91.22,22.32 | J1.MP1 92.08,12.39 92.08,20.45 91.95,20.58 EPD_C1.2 91.95,20.64 91.95,20.83 92.58,21.47 92.58,22.36 92.46,22.48 91.38,22.48 91.22,22.32 | J1.17 83.12,14.86 83.12,18.67 84.96,20.51 84.96,20.64 EPD_C6.2 85.03,20.77 85.03,20.9 85.66,21.53 85.66,22.48 | EPD_C7.2 83.57,20.71 82.23,20.71 EPD_C8.2 82.17,20.64 80.83,20.64 EPD_C9.2 80.83,20.71 80.2,21.34 80.2,21.4 79.88,21.72 79.88,22.36 79.14,23.1 | 79.16,23.6 80.71,25.15 C7.2 80.77,25.21 81.66,25.21 81.95,25.5 83.38,26.93 83.38,29.72 86.11,32.45 87.38,32.45 87.47,32.36 | 78.66,23.1 78.49,22.93 78.49,21.53 79.18,20.83 79.18,20.71 EPD_C10.2 | 87.47,32.36 88.01,31.82 90.23,31.82 D3.1 | 85.66,22.48 83.44,24.71 82.36,24.71 81.91,25.16 | 91.22,22.32 90.87,22.67 85.92,22.67 85.72,22.48 85.66,22.48 | C8.2 89.85,44.77 91.82,44.77 92.77,45.72 C10_SUPERCAP.1 92.65,45.53 93.73,44.45 93.73,42.74 | 87.57,41.53 92.52,41.53 93.73,42.74 | 87.57,41.53 82.93,41.53 81.72,42.74 81.72,43.12 U3.13 | IC4.2 125.86,39.63 125.98,39.63 127.15,40.8 128.33,41.98 128.33,45.03 C2_BAT.2 | C1_BAT1.2 136.78,37.66 132.46,37.66 132.33,37.79 C3.- 132.27,37.79 124.52,37.79 123.44,36.71 123.38,36.71 | 123.38,36.71 123.13,36.96 121.9,36.96 120.4,36.96 119.32,38.04 119.32,38.87 119.95,39.5 119.95,39.76 R1_PWRUSB.1 120.02,39.82 120.65,40.45 120.65,42.74 | 123.38,36.71 123.38,35.69 C1_BAT2.2
  Top 0.15: 120.65,42.74 120.65,46.95 | 120.65,47.31 121,47.31 131.57,47.31 132.33,48.07 132.33,48.77 131.76,49.34 131.51,49.34 MCP73831.2 | 126.65,40.8 126.36,41.09 124.4,41.09 121.92,38.61 121.73,38.61 121.54,38.42 121.54,37.35 | 120.65,42.74 93.73,42.74 | v87.57,32.45 87.47,32.36 | v87.57,41.47 87.57,41.53
  Top 0.152: 120.65,46.95 120.65,46.96 121,47.31 120.99,47.31 120.65,47.65 | 81.91,25.16 81.91,25.46 81.95,25.5 | 79.16,23.6 79.16,23.11 79.14,23.1 78.66,23.1 | 14.97,97.62 14.94,97.65 14.94,99.02 14.89,98.97 13.62,98.97 | 121.54,37.35 121.9,36.99 121.9,36.96 | 126.65,40.8 127.15,40.8
  Bottom 0.15: v7.75,46.17 7.75,46.55 v11.11,49.92 11.11,58.04 v7.75,61.41 | v36.01,42.99 36.01,43.18 33.27,45.91 v33.27,50.42 | v35.31,50.3 v34.61,49.6 34.61,48.33 40.83,42.11 43.24,42.11 52.45,32.9 55.56,32.9 67.31,21.15 v67.31,16.32 72.2,16.32 72.45,16.58 v72.52,16.58 73.47,17.53 v73.47,17.72 | v155.57,47.82 v157.54,45.85 | v87.57,41.47 v87.57,32.45
  pour Top: 6.32,44.64 6.3,44.61 6.27,44.6 0.08,44.6 0.08,0.08 75.92,0.08 75.92,9.97 75.93,10 75.96,10.02 75.98,10.03 94.22,10.03 94.24,10.02 94.26,10 94.28,9.97 94.28,0.08 170.12,0.08 170.12,67.08 92.18,67.08 92.16,67.09 92.14,67.11 92.12,67.14 92.12,110.98 68.08,110.98 68.08,110.38 68.06,110.36 68.04,110.33 68.02,110.32 20.28,110.32 20.26,110.33 20.24,110.36 20.22,110.38 20.22,110.98 0.08,110.98 0.08,62.98 6.27,62.98 6.3,62.97 6.32,62.95 6.34,62.92 6.34,44.66
  pour Bottom: 6.32,44.64 6.3,44.61 6.27,44.6 0.08,44.6 0.08,0.08 75.92,0.08 75.92,9.97 75.93,10 75.96,10.02 75.98,10.03 94.22,10.03 94.24,10.02 94.26,10 94.28,9.97 94.28,0.08 170.12,0.08 170.12,67.08 92.18,67.08 92.16,67.09 92.14,67.11 92.12,67.14 92.12,110.98 68.08,110.98 68.08,110.38 68.06,110.36 68.04,110.33 68.02,110.32 20.28,110.32 20.26,110.33 20.24,110.36 20.22,110.38 20.22,110.98 0.08,110.98 0.08,62.98 6.27,62.98 6.3,62.97 6.32,62.95 6.34,62.92 6.34,44.66
GND1  (via drill 0.3)
  Top 0.15: v72.52,23.37 73.85,22.04 D6.1 | v52.01,36.9 50.55,36.9 49.47,37.98 D10.1 49.4,38.04 47.82,38.04 D11.1 47.75,38.04 44.01,38.04 D12.1 43.88,38.04 36.2,45.72 | 36.2,45.72 35.69,45.22 D9.1 | 36.2,45.72 36.39,45.91 36.39,48.45 34.86,49.98 34.86,54.04 31.05,57.85 30.04,57.85 26.67,54.49 14.03,54.49 7.05,61.47 7.05,76.52 13.34,82.81 13.34,98.81 13.14,99 12,99 11.37,98.37 11.11,98.37 D8.1
  Bottom 0.15: v72.52,23.37 65.53,23.37 v52.01,36.9
GPIO8
  Top 0.15: R1.1 19.18,42.17 19.18,45.03 U2.10
I2C_PW
  Top 0.15: R2-PINH.2 161.1,6.99 159.77,6.99 R1_PINH.2 159.7,6.99 158.05,6.99 C1.1 | C2.1 156.46,6.93 157.99,6.93 C1.1 | SENSOR2.6 159.19,9.85 159.19,10.04 158.69,10.55 158.6,10.55 158.43,10.55 158.2,10.55 158.12,10.55 157.67,10.1 157.67,9.85 SENSOR2.8 157.61,9.72 157.61,6.99 C1.1 | 158.43,10.95 158.43,11.45 158.43,11.55 | 158.43,12.25 158.43,12.64 SENSOR2.2 | 158,11.94 144.27,11.94 119.38,36.83 81.28,36.83 59.94,58.17 29.91,58.17 26.54,54.81 22.23,54.81 21.72,55.31 21.72,62.49 U2.17
  Top 0.152: 158,11.94 158.04,11.94 | 158.43,11.45 157.99,11.89 158.04,11.94 | 158.04,11.94 158.35,12.25 158.43,12.25 | 158.43,10.95 158.43,10.78 | 158.2,10.55 158.43,10.78 | 158.43,10.78 158.6,10.61 158.6,10.55
INT_RTC  (via drill 0.3)
  Top 0.15: 90.42,52.39 90.42,52.2 88.9,50.68 84.39,50.68 | 90.42,52.39 90.42,53.09 89.79,53.73 89.79,53.92 R1-PINH1.1 | 84.39,50.68 83,52.07 83,52.39 U3.3 | v35.56,48.07 19.43,48.07 16.64,45.28 16.64,45.09 U2.8 | v84.14,49.28 84.14,50.36 84.39,50.61 84.39,50.68 | TP15.TP 103.57,52.39 90.49,52.39 90.42,52.39
  Bottom 0.15: v35.56,48.07 80.39,48.07 83.5,44.96 83.88,44.96 84.14,45.22 v84.14,49.28
IO/BOOT  (via drill 0.3)
  Top 0.15: C6.1 27.3,109.03 26.42,109.03 BOOT_BUTTON.3 25.72,109.67 22.29,109.67 BOOT_BUTTON.4 22.23,109.67 21.4,108.84 | 21,108.84 20.57,108.84 R_BOOT.2 | v22.99,106.37 24.19,105.16 24.19,62.55 U2.15 | 21.21,108.65 v21.21,108.14
  Top 0.152: 21.4,108.84 21.21,108.65 21.19,108.65 21,108.84 | 21.4,108.84
  Bottom 0.15: v21.21,108.14 v22.99,106.37
IO/CHANGE  (via drill 0.3)
  Top 0.15: CHANGE_BUTTON.4 62.42,109.67 65.85,109.67 CHANGE_BUTTON.3 65.91,109.67 66.93,108.65 68.14,108.65 C10.1 68.2,108.59 68.83,107.95 68.83,106.88 68.71,106.75 62.23,106.75 60.33,108.65 60.2,108.65 R_CHANGE.2 60.13,108.65 59.56,108.08 v59.37,108.08 | v19.05,67.76 14.1,62.81 U2.23
  Bottom 0.15: v59.37,108.08 v19.05,67.76
MISO  (via drill 0.3)
  Top 0.15: R8.1 43.94,33.15 43.94,33.34 43.24,34.04 43.24,35.82 43.94,36.52 D12.2 43.5,36.14 v38.16,41.47 | v33.72,49.85 34.1,50.23 34.1,53.09 33.59,53.6 33.08,53.6 U1.2 | v9.84,61.41 9.02,62.23 9.02,62.49 U2.27 | v4.7,93.29 5.08,93.67 5.78,93.67 J4.P7 | v41.15,23.12 41.15,20.96 TP6.TP
  Bottom 0.15: v4.7,93.29 4.7,91.76 9.84,86.62 9.84,61.47 v9.84,61.41 16.89,61.41 22.61,55.69 29.65,55.69 33.72,51.63 33.72,49.92 v33.72,49.85 33.72,45.91 v38.16,41.47 38.16,41.41 38.16,29.15 41.15,26.17 v41.15,23.12
MOSI  (via drill 0.3)
  Top 0.15: v62.67,25.15 65.41,25.15 76.33,14.23 84.39,14.23 84.58,14.42 84.58,14.8 J1.14 | v48.51,32.58 48.39,32.58 47.82,33.15 R7.1 47.82,33.28 47.12,33.98 | v40.89,41.66 40.89,51.06 U1.5 | 47.12,33.98 47.12,34.93 47.75,35.56 47.75,36.52 D11.2 | 47.12,33.98 47.05,33.98 45.53,32.45 26.42,32.45 15.37,43.5 15.37,45.03 U2.7 15.3,45.09 15.3,45.41 11.56,49.15 v11.56,49.34 | v4.83,64.77 4.83,88.27 5.78,89.22 J4.P3 | v49.15,31.95 41.78,24.58 40.96,24.58 TP7.TP
  Bottom 0.15: v62.67,25.15 62.67,25.34 55.44,32.58 49.15,32.58 | 49.15,32.58 v48.51,32.58 48.51,32.64 40.89,40.26 v40.89,41.66 | v49.15,31.95 49.15,32.52 49.15,32.58 | v4.83,64.77 5.26,64.77 11.56,58.47 v11.56,49.34
N$1  (via drill 0.3)
  Top 0.15: v154.81,45.91 155.26,45.47 155.51,45.47 R2-USB.1 | v163.26,56.14 164.4,56.14 J2.B5
  Bottom 0.15: v154.81,45.91 154.81,47.69 v163.26,56.14
N$2  (via drill 0.3)
  Top 0.15: v89.15,20.01 89.15,14.86 J1.5 | v89.72,21.34 90.36,21.98 EPD_C2.1
  Bottom 0.15: v89.15,20.01 89.15,20.77 v89.72,21.34
N$3
  Top 0.15: J1.4 89.66,14.86 89.66,18.8 91.19,20.32 91.19,21.15 91.89,21.85 EPD_C1.1
N$4
  Top 0.15: R2-USB1.2 155.51,44.2 155.7,44.2 156.34,43.57 157.23,43.57 161.61,47.95 161.61,50.87 163.89,53.15 164.4,53.15 J2.A5
N$7
  Top 0.15: C_DELAY.1 52.39,102.62 50.48,104.53 IC1.5
N$9
  Top 0.15: R_CAPACITOR.1 83.5,54.87 83.5,56.01 84.39,56.9 D7.1
N$14
  Top 0.15: C4_USB.1 152.65,47.57 152.65,47.44 153.73,46.36 157.54,46.36 158.81,47.63 158.81,49.03 C5_USB.1
N$16
  Top 0.15: R1_PWRUSB.2 120.02,38.49 120.65,38.49 122.17,40.01 D2.2 122.24,40.07 127.83,45.66 128.91,45.66 129.35,45.22 135.89,45.22 Q1.1
N$17
  Top 0.15: 125.09,38.61 125.79,38.61 IC4.3 125.86,38.68 127.57,38.68 128.08,39.18 136.78,39.18 C1_BAT1.1 136.84,38.99 136.84,44.2 137.79,45.15 Q1.2 | 125.09,38.61 124.9,38.61 124.27,37.98 122.24,37.98 D2.1 | IC4.1 125.79,40.52 125.67,40.52 125.09,39.95 125.09,38.68 125.09,38.61
N$24
  Top 0.15: C7.1 79.44,25.21 79.44,26.48 80.45,27.5 L1.2
N$26
  Top 0.15: 88.39,30.17 93.22,30.17 C4.1 | 88.39,30.17 86.81,31.75 D3.2 | D4.1 86.74,25.85 86.74,28.45 88.39,30.1 88.39,30.17
N$33
  Top 0.15: CHG_LED.A 126.3,49.92 128.46,49.92 128.84,50.3 MCP73831.4 128.91,50.36 129.41,50.87 132.14,50.87 133.1,49.92 135,49.92 C1_BAT.1
N$34
  Top 0.15: CHG_LED.C 124.84,49.85 124.84,48.39 R1_BAT.1
N$35
  Top 0.15: R1_BAT.2 126.17,48.33 127.83,48.33 128.21,47.95 131,47.95 131.44,48.39 MCP73831.1
N$36
  Top 0.15: R2_BAT.2 121.98,48.71 123.32,48.71 124.4,47.63 125.22,47.63 125.54,47.95 125.54,48.9 125.67,49.03 128.27,49.03 128.84,48.45 MCP73831.5
N$49
  Top 0.15: J1.24 79.57,14.86 79.57,15.18 75.44,19.31 74.11,19.31 73.41,20.01 EPD_C12.1
N$64
  Top 0.15: J1.22 80.58,14.86 80.58,19.75 79.88,20.45 79.88,21.28 79.25,21.91 EPD_C10.1
N$66  (via drill 0.3)
  Top 0.15: v81.66,19.94 81.66,14.86 J1.20 | v81.47,21.28 82.17,21.98 EPD_C8.1
  Bottom 0.15: v81.66,19.94 81.66,21.09 v81.47,21.28
N$67  (via drill 0.3)
  Top 0.15: v82.17,19.63 82.17,14.86 J1.19 | v82.93,21.34 83.57,21.98 EPD_C7.1
  Bottom 0.15: v82.17,19.63 82.17,20.58 v82.93,21.34
N$68
  Top 0.15: J1.18 82.68,14.86 82.68,18.67 84.33,20.32 84.33,21.34 84.96,21.98 EPD_C6.1
N$70
  Top 0.15: J1.15 84.07,14.86 83.63,14.86 J1.16 83.63,14.93 83.63,16.64 88.9,21.91 88.9,22.04 EPD_C5.1
PREVGH  (via drill 0.3)
  Top 0.15: v81.09,19.69 81.09,14.86 J1.21 | v81.03,22.67 81.03,22.17 80.83,21.98 EPD_C9.1 | v81.98,33.28 81.98,36.14 D5.1
  Bottom 0.15: v81.09,19.69 81.09,21.02 81.03,21.09 v81.03,22.67 81.03,22.74 83,24.71 83,25.34 81.98,26.36 v81.98,33.28
PREVGL
  Top 0.15: J1.23 80.07,14.86 80.07,15.24 75.44,19.88 75.06,19.88 EPD_C11.1 74.93,19.94 74.61,19.94 72.07,22.48 72.07,27.18 77.72,32.83 82.17,32.83 82.55,33.22 91.76,33.22 94.23,30.74 94.23,28.71 91.38,25.85 90.23,25.85 D4.2
RESE
  Top 0.15: 72.9,10.29 87.44,10.29 91.5,14.36 91.5,15.31 91.31,15.5 90.42,15.5 90.17,15.24 90.17,14.86 J1.3 | 72.9,10.29 70.99,8.39 R3.2 | Q3.2 69.28,15.82 69.28,13.97 72.9,10.35 72.9,10.29
RESE'
  Top 0.15: R2.2 69.34,9.91 69.34,7.81 68.9,7.37 SJ1.2 69.41,7.81 70.1,7.12 70.93,7.12 R3.1
RESET  (via drill 0.3)
  Top 0.15: RESET_BUTTON.3 50.74,109.67 47.31,109.67 RESET_BUTTON.4 47.24,109.61 46.99,109.61 v46.16,108.78 | 48.32,102.24 48.32,104.02 47.82,104.53 47.69,104.53 IC1.1 | 48.32,102.24 48.2,102.11 47.12,102.11 | 47.12,102.11 46.1,103.13 46.1,106.75 45.4,107.45 | 45.05,107.8 44.9,107.95 R_RESET.2 | C5.1 52.77,107.13 52.77,104.65 53.15,104.27 53.15,102.18 52.96,101.99 48.64,101.99 48.39,102.24 48.32,102.24 | v11.11,46.17 10.29,45.34 10.29,45.09 U2.3 | v22.23,55.44 22.23,59 47.12,83.89 47.12,102.11 | v45.66,108.02 45.45,107.81
  Top 0.152: 45.4,107.45 45.45,107.5 45.45,107.81 45.05,107.81 45.05,107.8
  Bottom 0.15: v11.11,46.17 12.95,46.17 v22.23,55.44 | v46.16,108.78 46.16,108.53 v45.66,108.02
RTC_RST  (via drill 0.3)
  Top 0.15: v23.94,61.35 22.99,62.3 22.99,62.49 U2.16 | v76.58,57.85 81.66,52.77 81.66,52.46 U3.4
  Bottom 0.15: v23.94,61.35 73.09,61.35 v76.58,57.85
RX
  Top 0.15: U2.24 12.83,62.81 19.11,69.09 19.43,69.09 TP2.TP
SCK  (via drill 0.3)
  Top 0.15: 51.8,36.45 49.53,36.45 49.47,36.52 D10.2 | U1.6 40.89,52.33 40.89,52.01 44.32,48.58 44.32,45.22 52.45,37.09 52.45,36.71 52.2,36.45 52.2,35.95 52.2,33.75 | v84.71,15.88 85.09,15.5 85.09,14.86 J1.13 | 51.5,33.15 49.28,33.15 R6.1 49.28,33.09 49.28,32.71 44.58,28.01 41.08,28.01 TP8.TP 40.96,28.07 30.35,28.07 14.1,44.33 14.1,45.03 U2.6 14.03,45.09 14.03,45.34 v12.76,46.61 | 52.9,33.15 v56.39,33.15 | v4.7,91.13 5.02,91.44 5.78,91.44 J4.P5
  Top 0.152: 52.9,33.15 52.8,33.15 52.2,33.75 51.59,33.15 51.5,33.15 | 51.8,36.45 52.2,36.06 52.2,35.95
  Bottom 0.15: v84.71,15.88 81.85,18.74 77.79,18.74 72.07,24.45 65.09,24.45 v56.39,33.15 | v4.7,91.13 4.7,65.72 12.76,57.66 v12.76,46.61
SCL  (via drill 0.3)
  Top 0.15: v160.46,6.29 161.1,5.66 R2-PINH.1 | v160.21,11.82 160.21,12.45 160.02,12.64 SENSOR2.4 | v141.54,50.8 140.84,50.8 U4.7 | v141.54,49.92 141.54,44.39 164.5,21.44 | 164.5,21.44 165.1,20.83 J3.4 | v164.59,21.47 164.53,21.47 164.5,21.44 | v19.24,60.96 17.91,62.3 17.91,62.49 U2.20 | v83.69,45.41 83.69,45.22 85.47,43.44 85.47,43.18 U3.16
  Bottom 0.15: v160.46,6.29 160.46,11.56 v160.21,11.82 160.21,14.67 164.59,19.05 v164.59,21.47 | v141.54,49.92 v141.54,50.8 86.93,50.8 86.17,51.57 85.79,51.57 83.19,48.96 83.19,46.87 82.99,46.67 82.94,46.62 | v19.24,60.96 23.24,60.96 27.56,56.65 72.45,56.65 82.42,46.68 | v83.69,45.41 82.97,46.13
  Bottom 0.152: 82.99,46.67 82.99,46.14 82.97,46.13 | 82.94,46.62 82.48,46.62 82.42,46.68
SDA  (via drill 0.3)
  Top 0.15: v159,6.29 159.07,6.29 159.7,5.66 R1_PINH.1 | v159,11.82 159,12.45 159.19,12.64 SENSOR2.3 | v164.15,19.24 164.66,19.75 165.1,19.75 J3.3 | 83.5,45.85 83.25,45.6 83.25,44.39 84.2,43.44 84.2,43.18 U3.15 | 84,46.35 84.33,46.68 99.63,46.68 104.71,51.76 140.08,51.76 140.46,51.38 140.78,51.38 U4.8 140.84,51.31 141.86,51.31 142.94,50.23 v143.13,50.23 | v20,61.41 19.18,62.23 19.18,62.49 U2.19 | v82.74,47.06 83.47,46.33
  Top 0.152: 83.5,45.85 83.47,45.88 83.47,46.33 83.98,46.33 84,46.35
  Bottom 0.15: v159,6.29 v159,11.82 159,13.91 164.15,19.05 v164.15,19.24 164.15,29.21 v143.13,50.23 | v20,61.41 23.24,61.41 27.69,56.96 72.83,56.96 v82.74,47.06
SRC  (via drill 0.3)
  Top 0.15: C4.2 93.28,28.83 93.28,29.02 93.92,29.66 93.92,30.61 91.63,32.9 82.68,32.9 81.92,32.14 80.52,32.14 L1.1 79.84,31.46 v79.84,30.29 | Q3.3 68.58,17.97 68.39,17.97 59.82,26.55 59.82,27.18 68.77,36.14 78.42,36.14 D5.2 78.42,36.07 80.14,34.36 v80.14,33.41
  Bottom 0.15: v80.14,33.41 79.84,33.11 v79.84,30.29
SS_SD  (via drill 0.3)
  Top 0.15: D8.2 12.57,98.3 11.87,97.6 10.54,97.6 9.59,98.56 7.43,98.56 R10.1 7.37,98.49 7.37,89.35 6.22,88.21 J4.P2 6.22,88.14 6.79,87.57 6.79,86.62 5.84,85.67 v5.84,63.58 | v7.05,53.22 11.56,48.71 11.56,45.09 U2.4
  Bottom 0.15: v5.84,63.58 6.25,63.18 6.37,63.18 7.05,62.5 v7.05,53.22
TX
  Top 0.15: U2.25 11.56,67.82 14.29,70.55 TP1.TP
USB_D+  (via drill 0.3)
  Top 0.15: v26.35,55.25 29.72,58.62 144.21,58.62 153.8,49.03 154.56,49.03 D1.1 | v25.08,45.91 24.26,45.09 U2.14
  Bottom 0.15: v26.35,55.25 26.35,47.19 v25.08,45.91
USB_D-  (via drill 0.3)
  Top 0.15: v153.54,47.19 154.56,47.19 D1.3 | v24.32,51.5 v30.23,57.41 | v23.88,46.17 22.99,45.28 22.99,45.09 U2.13
  Bottom 0.15: v153.54,47.19 149.61,47.19 139.38,57.41 v30.23,57.41 | v24.32,51.5 24.32,46.61 v23.88,46.17
VBAT
  Top 0.127: 132.62,47.98 132.75,48.11 132.75,49.31 131.76,50.3 131.51,50.3 MCP73831.3 | 132.62,47.98 131.06,46.42 128.4,46.42 C2_BAT.1 | U4.2 138.88,50.8 138.88,50.42 U4.3 138.81,50.36 138.56,50.36 136.91,48.71 136.91,47.95 | 136.91,47.95 136.91,47.31 Q1.3 136.91,47.25 140.97,43.18 140.97,40.52 TP3.TP | 136.91,47.95 132.65,47.95 132.62,47.98
VBUS  (via drill 0.3)
  Top 0.127: v155.57,46.8 156.78,48.01 157.1,48.01 D1.5 | v154.05,42.3 152.97,41.22 PFMF.050.1.2 | v120.21,44.77 112.08,44.77 TP14.TP
  Bottom 0.127: v155.57,46.8 155.57,43.82 v154.05,42.3 154.05,42.36 145.73,50.68 142.94,50.68 137.03,44.77 v120.21,44.77
VRTC
  Top 0.127: C10_SUPERCAP.2 92.77,43.5 89.85,43.5 C8.1 89.79,43.44 87.38,43.44 85.79,41.85 83.88,41.85 83,42.74 83,43.12 U3.14 82.93,43.18 82.3,43.82 82.3,53.41 82.55,53.66 83.44,53.66 84.58,54.81 84.77,54.81 R_CAPACITOR.2
VUSB
  Top 0.127: J2.A9 164.47,56.9 164.47,56.71 J2.B4 164.53,56.71 164.91,56.71 165.61,56.01 165.61,52.77 164.97,52.14 164.53,52.14 J2.B9 164.47,52.14 164.47,51.88 J2.A4 164.4,51.82 163.89,51.82 161.93,49.85 161.93,45.72 157.42,41.22 PFMF.050.1.1
(copper drawn outside any net)
  shapes: Top area x12